# Altium PCB PCB_ESP32.PcbDoc (part 3 of 3)
Units mil, origin at the board's own origin, x right, y up, seen from the top; angles counter-clockwise.
Board outline 2700 x 1000 mil, 4 copper layers (L1, L2, L3, L4), stack 61.583 mil thick; 64 components, 73 nets, 299 pads, 161 vias.
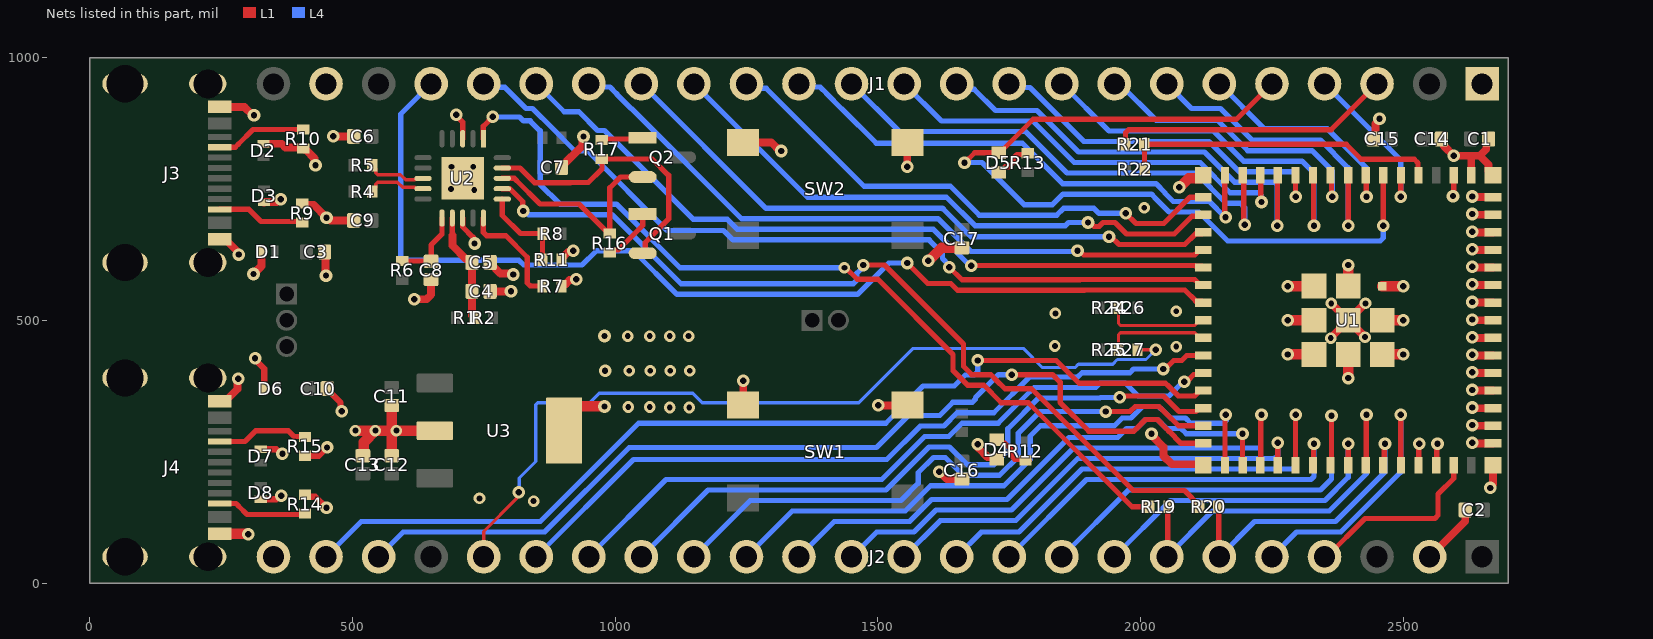
[diagram p4: the nets of this part, all layers, seen from the top]

## Via types
v1: diameter 24, hole 12, L1 to L4, tented both sides, 126 vias
v2: diameter 22, hole 11, L1 to L4, tented both sides, 35 vias

## Nets (pads, with @x,y where several pads share a name; then routed paths per layer and width w, separated by ;. In a path a pad name is that pad's centre, name@x,y a point inside that pad or via, vN(x,y) a via of type N, cw(c..) or ccw(c..) an arc to the next point about the centre after c; other vN are vias at no path point) (continued)
CON_ESP_USB_P: J2.20 R27.1 | length 1633.9
  L1 w6.03: J2.20@750,50 750,98 813.03,161.03 813.03,169.41 v1(816.47,172.85) ; R27.1@1993.91,444 v1(2029,444)
  L4 w6.03: v1(816.47,172.85) 817.75,174.13 817.75,199.89 849.14,231.28 849.14,339.47 852.67,343 951.62,343 969.64,361.01 1147.95,361.01 1165.96,343 1463.84,343 1567.41,446.57 1776.59,446.57 1812.98,410.17 1875.64,410.17 1881.71,416.25 1946.93,416.25 1955.93,425.25 2010.25,425.25 v1(2029,444)
CON_GPIO0: J1.3 R21.1 | length 539.3
  L1 w10: R21.1@1971.09,835 1971.09,856.73 1976.94,862.59 2362.59,862.59 J1.3@2450,950
DTR_FTDI: Q2.2 R16.1 U2.18 | length 406.3
  L1 w10: U2.18@785.41,770 808.39,770 812,766.39 857,721.39 931.36,721.39 987.83,664.91 R16.1@990,664.91 990,752 1010.6,772.6 Q2.2@1052.58,772.6
ESP_USB_N: R24.2 R26.2 U1.23 | length 197.8
  L1 w6.03: R26.2@1958.09,524 1958.09,493.82 1961.62,490.28 2103.18,490.28 2106.72,493.82 2106.72,495.14 2111.57,500 U1.23@2119.45,500
ESP_USB_P: R25.2 R27.2 U1.24 | length 196.3
  L1 w6.03: R27.2@1958.09,444 1958.09,472.72 1961.62,476.25 2103.18,476.25 2106.72,472.72 2106.72,471.39 2111.57,466.54 U1.24@2119.45,466.54
FTDI_RESET: C8.2 R6.2 U2.11 | length 146.1
  L1 w10: R6.2@595,612.91 595.32,612.6 649.69,612.6 C8.2@650,612.28 650,643.18 667.82,661 670.63,663.81 U2.11@670.63,694.59
FTDI_USB_N: R4.2 U2.9 | length 113.8
  L1 w6.23: R4.2@537.91,745 544.44,751.53 544.44,759.24 548.09,762.89 585.82,762.89 595.66,753.04 619.21,753.04 621.93,750.32 U2.9@634.59,750.32
FTDI_USB_P: R5.2 U2.8 | length 113.8
  L1 w6.23: R5.2@537.91,795 544.44,788.47 544.44,780.76 548.09,777.11 591.71,777.11 601.55,767.27 619.21,767.27 621.93,770 U2.8@634.59,770
GND: C1.1 C2.1 C3.1 C4.1 C5.1 C6.1 C7.1 C8.1 C9.1 C10.1 C11.1 C12.1 C13.1 C14.1 C15.1 C16.1 C17.1 D1.1 D2.1 D3.1 D4.1 D6.1 D7.1 D8.1 J1.1 J1.23 J2.2 J2.24 J3.A1B12 J3.B1A12 J3.S1 J3.S2 J3.S3 J3.S4 J4.A1B12 J4.B1A12 J4.S1 J4.S2 J4.S3 J4.S4 R7.2 R9.2 R10.2 R11.1 R14.2 R15.2 SW1.3 SW1.4 SW2.3 SW2.4 U1.1 U1.2 U1.42 U1.43 U1.46 U1.47 U1.48 U1.49 U1.50 U1.51 U1.52 U1.53 U1.54 U1.55 U1.56 U1.57 U1.58 U1.59 U1.60 U1.61 U1.62 U1.63 U1.64 U1.65 U1.66 U1.67 U1.68 U1.69 U1.70 U1.71 U1.72 U1.73 U2.3 U2.13 U2.21 U3.2 U3.4 | length 3996.4
  L1 w10: U1.42@2528.9,224.41 2529.45,224.96 2529.45,264.45 v1(2530,265) ; U1.43@2562.36,224.41 2563.68,225.73 2563.68,263.68 v1(2565,265) ; v1@2595.83,737.64 U1.2@2595.83,775.59
  L1 w10.1: v1(698,891) 698,889.09 710,877.09 U2.3@710,845.41 ; U2.13@710,694.59 710,677.87 730,657.86 730,648.83 v1(732.66,646.17)
  L1 w12: v1(315,428) 315,424.75 332.2,407.55 D6.1@332.2,370 ; D7.1@325.56,254.44 D7.1@325.56,254.44 355.37,254.38 363.75,246 v1(367,246) ; D8.1@326,159.41 355.16,159.41 361.75,166 v1(365,166) ; R14.2@410,167.91 413.65,164.27 429.73,164.27 v1(451,143) ; R15.2@410,242.09 436.09,242.09 v1(452,258) ; C10.1@452.28,370 452.28,368.43 458.88,361.83 459.06,361.83 477.7,343.19 477.7,329.3 v1(480,327)
  L1 w15: J4.A1B12@247.64,346.06 258.46,346.06 281.28,368.88 281.28,387.28 v1(283,389) ; J3.B1A12@247.64,653.94 258.46,653.94 282.28,630.12 282.28,626.72 v1(284,625) ; J3.A1B12@247.64,905.91 247.69,905.95 283,905.95 294.53,905.95 310.56,889.91 v1(313,889.91) ; v1(312,588) 327.2,603.2 D1.1@327.2,630 ; D2.1@331,835.8 365.72,835.8 372.69,828.82 405.26,828.82 R10.2@407,827.09 409.15,824.94 411.31,824.94 428.28,807.97 428.28,796.72 v1(430,795) ; D3.1@332,724.2 332.61,724.81 356.2,724.81 361.52,730.13 v1(363.95,730.13) ; R9.2@405,721.91 407.17,721.91 409.31,719.77 426.54,719.77 v1(451,695.31) 453.44,695.31 458.75,690 C9.1@502.72,690 ; C3.1@447.28,630 448.64,628.64 448.64,586.36 v1(450,585) ; v1(464,850) C6.1@502.72,850 ; v1(618,540) 641.21,540 650,548.79 C8.1@650,577.72 ; C4.1@762.28,555 v1@802.03,554.97 ; C5.1@762.28,610 762.28,608.43 781.99,588.72 804.28,588.72 v1(806,587) ; R7.2@897.91,565 897.91,567.17 900.06,569.31 906.31,569.31 913.28,576.28 924.28,576.28 v1(926,578) ; R11.1@897.91,612.83 897.91,617.17 911.03,630.28 918.54,630.28 v1(920.26,632) ; C7.1@898.28,791 898.28,792.57 938.33,832.62 938.33,847.86 v1(940.05,849.58) ; SW1.4@1243.5,338.58 1244,339.08 v1(1244,385) ; SW2.4@1243.5,838.58 1297.17,838.58 1313.66,822.09 v1(1316.09,822.09) ; v1(1501,338) 1555.91,338 SW1.3@1556.5,338.58 ; v1(1556,792) 1556,838.09 SW2.3@1556.5,838.58 ; v1(1617,212) 1631.28,197.72 C16.1@1660,197.72 ; v1(1690.22,264) 1691.94,262.28 1691.94,256.42 1708.75,239.61 1721.69,239.61 D4.1@1726,235.3 ; v1(2020.82,284) 2020.82,281.56 2043.75,258.63 2043.75,241.91 2059.64,226.03 2117.83,226.03 U1.64@2119.45,224.41 ; v2(2362,466) 2362,466.96 U1.61@2395.04,500 ; v2(2363,532) U1.61@2395.04,500 ; v2(2427,468) U1.61@2395.04,500 ; v2(2428,532) 2427.04,532 U1.61@2395.04,500 ; C15.1@2442.72,845 2447.18,849.47 2447.18,873.88 2454.53,881.22 v1(2454.53,883.66) ; J2.2@2550,50 2617.72,117.72 C2.1@2617.72,139 ; C14.1@2572.28,845 2577.38,839.9 2577.38,831.62 v1(2596,813) 2630,813 ; U1.1@2629.29,775.59 2629.29,812.29 2630,813 ; v1@2632.68,265.75 U1.46@2670.63,265.75 ; v1@2632.68,299.21 U1.47@2670.63,299.21 ; v1@2632.68,332.68 U1.48@2670.63,332.68 ; v1@2632.68,366.14 U1.49@2670.63,366.14 ; v1@2632.68,399.61 U1.50@2670.63,399.61 ; v1@2632.68,433.07 U1.51@2670.63,433.07 ; v1@2632.68,466.54 U1.52@2670.63,466.54 ; v1@2632.68,500 U1.53@2670.63,500 ; v1@2632.68,533.46 U1.54@2670.63,533.46 ; v1@2632.68,566.93 U1.55@2670.63,566.93 ; v1@2632.68,600.39 U1.56@2670.63,600.39 ; v1@2632.68,633.86 U1.57@2670.63,633.86 ; v1@2632.68,667.32 U1.58@2670.63,667.32 ; v1@2632.68,700.79 U1.59@2670.63,700.79 ; v1@2632.68,734.25 U1.60@2670.63,734.25 ; C1.1@2662.28,845 2657.82,840.53 2657.82,825.42 2645.39,813 ; v1(2665.37,180.99) 2665.37,183.42 2670.63,188.68 U1.65@2670.63,224.41 ; U1.62@2670.63,775.59 2662.38,783.84 2662.38,796.01 2645.39,813 ; 2630,813 2645.39,813
  L1 w20: J4.B1A12@247.64,94.09 248.19,93.55 301.45,93.55 v1(302,93) ; v2(506,290) v2(544,290) v2(584,290) U3.2@656.97,290 ; C13.1@520,242.28 522.23,244.52 522.23,268.23 v2@543.62,289.62 ; C12.1@575,242.28 575,280.46 ; 575,299.54 C11.1@575,337.72 ; U3.4@903.03,290 903.03,311.55 927.48,336 v1(980,336) ; v1(1596,613) 1597.08,613 1621.8,637.72 C17.1@1660,637.72 ; v1(2073.41,753) 2074.49,753 2091.33,769.84 2113.7,769.84 U1.63@2119.45,775.59 ; v1(2280,435) U1.73@2330.08,435.04 ; v1(2280,500) U1.72@2330.08,500 ; v1(2280,565) U1.71@2330.08,564.96 ; v1(2395,390) U1.70@2395.04,435.04 ; U1.69@2395.04,564.96 v1(2395,605) ; U1.68@2460,435.04 v1(2500,435) ; U1.67@2460,500 v1(2500,500) ; U1.66@2460,564.96 v1(2500,565) v1(2500,565)
  other v1: 2631.36,267.07 2631.36,300.53 2631.36,334 2631.36,367.46 2631.36,400.93 981,404 2631.36,434.39 2631.36,467.85 980,470 2631.36,501.32 2631.36,534.78 802.07,554.93 2631.36,568.25 2631.36,601.71 2631.36,635.18 2631.36,668.64 2631.36,702.11 2594.51,736.32 2631.36,735.57
  other v2: 845,156 742,161 1104,334 1141,334 1025,335 1066,335 1027,404 1067,404 1105,404 1142,404 2068,450 1837,451 1024,470 1066,470 1104,470 1140,470 1838,513 2068,517 2007,714 732,748 688,750 689,792 730,792
GPIO0: R21.2 R22.2 U1.4 | length 608.2
  L1 w10: R22.2@2007.91,787 2007.41,787.5 2007.41,834.5 R21.2@2006.91,835 2391.34,835 2420,806.34 2520.66,806.34 2528,799 2528,776.49 U1.4@2528.9,775.59
GPIO1: J1.4 U1.5 | length 315.8
  L1 w10: v1(2495,735) 2495.22,735.22 2495.22,775.37 U1.5@2495.43,775.59
  L4 w10: J1.4@2350,950 2495,805 v1(2495,735)
GPIO2: D5.1 J1.5 U1.6 | length 1643.8
  L1 w10: v1(1665,800) 1665.78,800 1684.48,818.7 D5.1@1730,818.7 1731.97,818.7 1795.86,882.59 2182.59,882.59 J1.5@2250,950 ; v1@2461.97,680.04 U1.6@2461.97,775.59
  L4 w10: v1(1665,800) 1698,800 1778,720 1832.18,720 1852.18,740 2020.55,740 2026.41,734.14 2026.41,733.53 2053.94,706 2110.82,706 2165.82,651 2456,651 2461.95,656.95 v1(2461.95,680.02)
GPIO3: J1.6 U1.7 | length 442.5
  L1 w10: U1.7@2428.5,775.59 2429.25,774.84 2429.25,735.75 v1(2430,735)
  L4 w10: J1.6@2150,950 2235,865 2355,865 2430,790 v1(2430,735)
GPIO4: J1.7 U1.8 | length 616.9
  L1 w10: v1(2395,680) U1.8@2395.04,775.59
  L4 w10: J1.7@2050,950 2097,903 2152,903 2212.24,842.76 2342.24,842.76 2395,790 v1(2395,680)
GPIO5: J1.8 U1.9 | length 574.9
  L1 w10: U1.9@2361.57,775.59 2363.29,773.88 2363.29,736.71 v1(2365,735)
  L4 w10: J1.8@1950,950 1960,950 2030,880 2146.72,880 2203.95,822.76 2326.38,822.76 2365,784.14 v1(2365,735)
GPIO6: J1.9 U1.10 | length 747.8
  L1 w10: U1.10@2327.34,776.32 2329.06,774.61 2329.06,680.94 v1(2330,680)
  L4 w10: J1.9@1850,950 1940,860 2138.43,860 2195.67,802.76 2307.24,802.76 2330,780 v1(2330,680)
GPIO7: J1.10 U1.11 | length 699.3
  L1 w10: U1.11@2294.65,775.59 2294.82,775.41 2294.82,735.18 v1(2295,735)
  L4 w10: J1.10@1750,950 1757.23,942.77 1789.23,942.77 1892,840 2130,840 2187.24,782.76 2289.14,782.76 2295,776.91 v1(2295,735)
GPIO8: J1.11 U1.12 | length 863.5
  L1 w10: v1(2260,680) 2260.59,680.59 2260.59,776.14 U1.12@2260.41,776.32
  L4 w10: J1.11@1650,950 1660.33,939.67 1683.33,939.67 1724,899 1803,899 1882,820 2121.72,820 2178.95,762.76 2254.14,762.76 2260,756.91 v1(2260,680)
GPIO9: J1.12 U1.13 | length 831.7
  L1 w10: U1.13@2227.72,775.59 2228.86,774.45 2228.86,726.14 v1(2230,725)
  L4 w10: J1.12@1550,950 1621,879 1794.72,879 1873.72,800 2113.43,800 2170.67,742.76 2224.14,742.76 2230,736.91 v1(2230,725)
GPIO10: J1.13 U1.14 | length 972
  L1 w10: U1.14@2194.63,774.43 2196.13,772.93 2196.13,683.87 v1(2198,682)
  L4 w10: J1.13@1450,950 1541,859 1781,859 1860,780 2105.15,780 2162.38,722.76 2190,722.76 2198,714.76 v1(2198,682)
GPIO11: J1.14 U1.15 | length 998.3
  L1 w10: U1.15@2160.79,775.59 2160.39,775.2 2160.39,697.11 v1(2161.73,695.77)
  L4 w10: J1.14@1350,950 1356.23,943.77 1390.23,943.77 1403,931 1403,930.53 1430.53,903 1431,903 1497,837 1774.72,837 1851.72,760 2029,760 2046.41,742.59 2046.41,741.82 2062.22,726 2130.86,726 2161.09,695.77 v1(2161.73,695.77)
GPIO12: J1.15 U1.16 | length 1011.2
  L1 w10: v1(1971.86,703.51) 1991.37,684 2044,684 2094.25,734.25 U1.16@2119.45,734.25
  L4 w10: J1.15@1250,950 1258.73,941.27 1287.73,941.27 1474,755 1638,755 1693,700 1798.72,700 1840.47,700 1853.47,713 1911.18,713 1920.68,703.51 v1(1971.86,703.51)
GPIO13: J1.16 U1.17 | length 1114.5
  L1 w10: v1(1900,686) 1903.79,686 1911.46,678.33 1921.14,678.33 1928.82,686 1951.18,686 1973.18,664 2064,664 2097.91,697.91 2116.57,697.91 U1.17@2119.45,700.79
  L4 w10: J1.16@1150,950 1366,734 1630.72,734 1684.72,680 1856.82,680 1862.82,686 v1(1900,686)
GPIO14: J1.17 U1.18 | length 1205.9
  L1 w10: v1(1940,659) 1943.79,659 1958.79,644 2084,644 2104.45,664.45 2116.57,664.45 U1.18@2119.45,667.32
  L4 w10: J1.17@1050,950 1287,713 1622.57,713 1623.57,712 1624.43,712 1677.43,659 v1(1940,659)
GPIO15: J1.18 U1.19 | length 1310.3
  L1 w10: v1(1880,632) 1883.79,632 1891.79,624 2102.84,624 2108.7,629.86 2108.7,630.98 2111.57,633.86 U1.19@2119.45,633.86
  L4 w10: J1.18@950,950 956.23,943.77 990.23,943.77 1003,931 1003,930.53 1030.53,903 1031,903 1241,693 1614.28,693 1615.28,692 1616.15,692 1677.15,631 1879,631 v1(1880,632)
GPIO16: J1.19 U1.20 | length 1414.3
  L1 w10: v1(1677.63,604) 2102.84,604 2103.58,603.27 2116.57,603.27 U1.20@2119.45,600.39
  L4 w10: J1.19@850,950 903.32,896.68 931.14,896.68 966.82,861 980,861 1149,692 1213.72,692 1232.72,673 1606,673 1675,604 v1(1677.63,604)
GPIO17: J1.20 U1.21 | length 1537.8
  L1 w10: v1(1636,601) 1660,577 1884.38,577 1884.9,577.52 2102.84,577.52 2108.7,571.66 2108.7,569.8 2111.57,566.93 U1.21@2119.45,566.93
  L4 w10: J1.20@750,950 756.73,943.27 790.27,943.27 830.53,903 843,903 846.5,899.5 846.75,899.5 877.5,868.75 877.5,868.5 923.42,822.58 947.42,822.58 1099,671 1206.43,671 1224.43,653 1597.72,653 1623,627.72 1623,617.79 1636,604.79 v1(1636,601)
GPIO18: J1.21 U1.22 | length 1989.9
  L1 w10: v1(1556,609) 1595,570 1638.72,570 1651.72,557 1892.67,557 1893.19,557.52 2084.02,557.52 2105.2,536.34 2116.57,536.34 U1.22@2119.45,533.46
  L4 w10: J1.21@650,950 592,892 592,619.86 597.86,614 817.18,614 826.18,605 937.18,605 964.55,632.37 1034.63,632.37 1117.66,549.34 1461.34,549.34 1521,609 v1(1556,609)
GPIO21: J2.19 U1.25 | length 1428.1
  L1 w10: v1(2043,407.23) 2046.79,407.23 2063.22,423.67 2078.44,423.67 2087.84,433.07 U1.25@2119.45,433.07
  L4 w10: J2.19@850,50 1034.97,234.97 1516.93,234.97 1580.96,299 1626,299 1651,324 1720.72,324 1788.88,392.16 1880.27,392.16 1888.35,400.23 1979.75,400.23 1986.75,407.23 v1(2043,407.23)
GPIO26: J2.18 U1.26 | length 1334.3
  L1 w10: v1(2083.04,383) 2085.72,385.68 2090.09,385.68 2101.14,396.73 2116.57,396.73 U1.26@2119.45,399.61
  L4 w10: J2.18@950,50 1097.13,197.13 1507.37,197.13 1589.25,279 1635,279 1660,304 1729,304 1790,365 1790.64,365 1797.8,372.16 1914.69,372.16 1922.77,380.23 1971.46,380.23 1995.69,356 2053.86,356 2080.86,383 v1(2083.04,383)
GPIO33: J2.17 U1.28 | length 1263.9
  L1 w10: v1(1960.28,353.23) 1962.96,355.91 1981.55,355.91 1981.64,356 2043.57,356 2073.34,326.23 2105.13,326.23 2111.57,332.68 U1.28@2119.45,332.68
  L4 w10: J2.17@1050,50 1177.13,177.13 1515.66,177.13 1597.53,259 1636.47,259 1670.47,225 1720.86,225 1747.36,251.5 1747.36,293.43 1806.09,352.16 1922.98,352.16 1924.05,353.23 v1(1960.28,353.23)
GPIO34: J2.16 U1.29 | length 1169.1
  L1 w10: v1(1934,326.23) 1980.16,326.23 1989.92,336 2035.29,336 2072.08,299.21 U1.29@2119.45,299.21
  L4 w10: J2.16@1150,50 1257.13,157.13 1543.99,157.13 1576.93,190.07 1576.93,210.12 1605.82,239 1628.18,239 1646.05,221.14 1662.18,205 1731.72,205 1767.36,240.64 1767.36,285.15 1808.45,326.23 v1(1934,326.23)
GPIO35: J2.15 U1.31 | length 1179
  L1 w10: U1.31@2160.79,224.41 v1@2160.79,319.21
  L4 w10: J2.15@1250,50 1337.13,137.13 1552.27,137.13 1600.15,185 1740,185 1790,235 1790,279.5 1809.73,299.23 1950.43,299.23 1965.2,314 1982,314 2004,336 2034,336 2039,331 2040.28,331 2057.28,314 2085.37,314 2095.37,304 2157.14,304 2163,309.86 2163,319.28 v1(2161.93,320.35)
GPIO36: J2.14 U1.32 | length 1023
  L1 w10: v1(2194,284) 2194,224.66 U1.32@2194.25,224.41
  L4 w10: J2.14@1350,50 1417,117 1489.59,117 1489.72,117.13 1560.56,117.13 1602.43,159 1745.86,159 1863.86,277 1956.48,277 1973.48,294 1992.63,294 2009.63,311 2032,311 2049,294 2077.09,294 2087.09,284 v1(2194,284)
GPIO37: J2.13 U1.33 | length 1024.5
  L1 w10: U1.33@2228.48,223.68 2228.86,224.06 2228.86,318.86 v1(2230,320)
  L4 w10: J2.13@1450,50 1450.87,50 1498,97.13 1568.84,97.13 1610.72,139 1754.15,139 1872.15,257 2228,257 2228,318 v1(2230,320)
GPIO38: J2.12 U1.34 | length 857.7
  L1 w10: v1(2261,267) 2261.18,266.82 U1.34@2261.18,224.41
  L4 w10: J2.12@1550,50 1619,119 1762.43,119 1880.43,237 2255.14,237 2261,242.86 v1(2261,267)
GPIO39: J2.11 U1.35 | length 909.5
  L1 w10: U1.35@2294.82,224.27 2294.82,319.82 v1(2295,320)
  L4 w10: J2.11@1650,50 1697,97 1768.72,97 1888.72,217 2289.14,217 2295,222.86 v1(2295,320)
GPIO40: J2.10 U1.36 | length 746.8
  L1 w10: U1.36@2328.11,224.41 2329.06,225.35 2329.06,264.06 v1(2330,265)
  L4 w10: J2.10@1750,50 1897,197 2324.14,197 2330,202.86 v1(2330,265)
GPIO41: J2.9 U1.37 | length 790
  L1 w10: U1.37@2362.34,223.68 2363.29,224.63 v1(2363.29,318.29)
  L4 w10: J2.9@1850,50 1977,177 2342.43,177 2363.29,197.86 v1(2363.29,318.29)
GPIO42: J2.8 U1.38 | length 612
  L1 w10: U1.38@2395.04,224.41 v1(2395,265)
  L4 w10: J2.8@1950,50 2057,157 2350.72,157 2395,201.28 v1(2395,265)
GPIO45: J2.5 U1.41 | length 516
  L1 w10: U1.41@2495,224.88 2495.22,225.1 2495.22,319.78 v1(2495,320)
  L4 w10: J2.5@2250,50 2297,97 2381,97 2495,211 v1(2495,320)
GPIO46: J2.4 U1.44 | length 356.6
  L1 w10: J2.4@2350,50 2354.18,50 2427.18,123 2560.26,123 2566.12,128.86 2566.12,169.42 2595.83,199.13 U1.44@2595.83,224.41
GPIO47: J2.23 U1.27 | length 1869.9
  L1 w10: v1(1690,423.56) 1839.44,423.56 1882.77,380.23 2047.62,380.23 2051.86,376 2071.86,356 2102.84,356 2108.7,361.86 2108.7,363.27 2111.57,366.14 U1.27@2119.45,366.14
  L4 w10: J2.23@450,50 517,117 857.72,117 1044.72,304 1515,304 1586,375 1645.43,375 1666.43,396 1684.14,396 1690,401.86 v1(1690,423.56)
GPIO48: J2.22 U1.30 | length 1810.1
  L1 w10: v1(1755.09,396.56) 1832.59,396.56 1847,382.14 1847,343.37 1901.33,289.04 1987.67,289.04 2009.63,311 2032,311 2047.82,295.18 2047.82,294.9 2053.67,289.04 2053.96,289.04 2077.25,265.75 U1.30@2119.45,265.75
  L4 w10: J2.22@550,50 597,97 866,97 1027,258 1497.28,258 1558.28,319 1617.72,319 1642.72,344 1680.14,344 1686,349.86 1686,353 1729.56,396.56 v1(1755.09,396.56)
NetC4_2: C4.2 C5.2 R1.2 R2.2 U2.12 | length 209.8
  L1 w10: 690.32,661 U2.12@690.32,694.59
  L1 w15: 690.32,661 690.32,642.5 716.14,616.67 721.04,616.67 C5.2@727.72,610 C4.2@727.72,555 727.72,509.37 R2.2@732.09,505
NetD4_2: D4.2 R12.1 | length 90.1
  L1 w10: D4.2@1726,272.7 1732.81,265.89 1742.21,265.89 1754.19,253.91 1754.19,253.05 1754.78,252.46 1754.78,241.25 1760.64,235.39 1778.69,235.39 R12.1@1781,233.09 ; R12.1@1776.93,233.09 R12.1@1788.55,233.09
NetD5_2: D5.2 R13.1 | length 75.5
  L1 w10: D5.2@1730,781.3 1731.97,781.3 1742.56,791.89 1749.99,791.89 1758.78,800.68 1758.78,809.75 1764.64,815.61 1782.69,815.61 R13.1@1785,817.91
NetJ3_A5: J3.A5 R10.1 | length 173.4
  L1 w10: J3.A5@247.64,829.13 247.77,829.26 277.26,829.26 283,835 310.91,862.91 R10.1@407,862.91
NetJ3_B5: J3.B5 R9.1 | length 166.6
  L1 w10: J3.B5@247.64,711.02 303.3,711.02 326.32,688 R9.1@404.72,688
NetJ4_A5: J4.A5 R15.1 | length 175.6
  L1 w10: J4.A5@247.64,269.29 295.72,269.29 316,289.57 378.43,289.57 389.05,278.95 408.96,278.95 R15.1@410,277.91
NetJ4_B5: J4.B5 R14.1 | length 171.8
  L1 w10: J4.B5@247.64,151.18 278.82,151.18 283,147 299.81,130.19 408.1,130.19 R14.1@410,132.09
NetQ1_1: Q1.1 R16.2 | length 106
  L1 w10: R16.2@990,629.09 994.65,633.73 1006.12,633.73 1052.58,680.19 Q1.1@1052.58,702.4
NetQ2_1: Q2.1 R17.2 | length 79.4
  L1 w10: R17.2@975,842.91 977.24,845.16 1050.33,845.16 Q2.1@1052.58,847.4
NetR7_1: R7.1 U2.15 | length 211.4
  L1 w10: U2.15@749.37,694.59 749.37,666.86 755.23,661 792,661 833,620 833,570.86 838.86,565 R7.1@862.09,565
RTS_FTDI: Q1.2 R17.1 U2.19 | length 539.7
  L1 w10: U2.19@785.41,789.68 808.91,789.68 809,789.77 818.8,789.77 846.75,761.83 915.25,761.83 915.42,762 949,762 975,788 R17.1@975,807.09 1070.68,807.09 1102,775.77 1102,693 1094.29,685.29 1094.29,684.93 1057.37,648 1057.37,632.39 Q1.2@1052.58,627.6
RXD_FTDI: R19.2 U2.1 | length 1684.2
  L1 w10: U2.1@749.37,845.41 749.37,869.13 767,886.76 v1(767,887) ; v2(1436.41,600) 1438.82,600 1460.82,578 1500,578 1643,435 1643,404.09 1670.53,376.56 1701.44,376.56 1735,343 1786.18,343 1984.18,145 R19.2@2017.09,145
  L4 w10: v1(767,887) 818.25,887 825.75,879.5 838.46,879.5 857.5,860.46 857.5,758.5 895,721 1002.57,721 1123.57,600 v2(1436.41,600)
TXD_FTDI: R20.2 U2.17 | length 1652.9
  L1 w10: U2.17@785.41,750.32 799.79,750.32 809,741.11 824.45,725.65 824.45,708.64 v1(825.09,708) ; v1(1472,605) 1513,605 1663,455 1663,412.37 1678.82,396.56 1714.82,396.56 1726,385.37 1741.82,369.56 1792.53,369.56 1986.09,176 2083.25,176 2112.09,147.17 R20.2@2112.09,145
  L4 w10: v1(825.09,708) 828.88,708 835.88,701 994.28,701 1125.95,569.34 1453.05,569.34 1460.12,576.41 1460.12,589.33 1472,601.21 v1(1472,605)
U0RXD: J2.6 R20.1 U1.40 | length 573.4
  L1 w10: R20.1@2147.91,145 2148.96,143.96 2148.96,51.04 J2.6@2150,50 ; U1.40@2461.97,224.41 2463.48,225.93 2463.48,263.48 v1(2465,265)
  L4 w10: J2.6@2150,50 2217,117 2371,117 2465,211 v1(2465,265)
U0TXD: J2.7 R19.1 U1.39 | length 750.3
  L1 w10: J2.7@2050,50 2051.46,51.46 2051.46,143.54 R19.1@2052.91,145 ; U1.39@2429.25,223.7 2429.25,319.25 v1(2430,320)
  L4 w10: J2.7@2050,50 2137,137 2359,137 2430,208 v1(2430,320)
VBUS_SENSE: R8.1 R11.2 U2.16 | length 172
  L1 w10: U2.16@785.41,730.63 785.41,699.59 820,665 R8.1@862.09,665 R11.2@862.09,615
pads on no net: J1.24 J3.A8 J3.B8 J4.A8 J4.B8 U2.2 U2.4 U2.5 U2.6 U2.7 U2.14

## Polygon pours and split planes (outlines as drawn)
GND on L1 "GND_L01_P008" (solid, remove dead copper, pour order 8): 1169,509 1169,158 894,158 822,230 494,230 494,342 501,349 822,349 822,350 977.81,505.81
GND on L1 "GND_L01_P007" (solid, remove dead copper, pour order 7): 2262,618 2522,618 2521,364 2521,362 2520,363 2261,363
+5V_VBUS2 on L1 "+5V_VBUS2_L01_P006" (solid, remove dead copper, pour order 6): 345,471 387,471 434,424 434,332 347,332
+5V_VBUS1 on L1 "+5V_VBUS1_L01_P005" (solid, remove dead copper, pour order 5): 342,673.04 342,528 429,528 429,673.96
+5 on L1 "+5_L01_P004" (solid, remove dead copper, pour order 4): 700,357.86 700,402 517,402 396,523 351,523 351,478 352,477 391,477 511.16,356.84
+3V3_REG on L1 "+3V3_REG_L01_P003" (solid, remove dead copper, pour order 3): 694.5,222.49 694.5,174.5 610.5,174.5 566.78,130.78 481.71,139.58 500.5,209.38 500.5,221.49
+3V3_FTDI on L1 "+3V3_FTDI_L01_P002" (solid, remove dead copper, pour order 2): 607,565 556,568 549,578 538,589 538,627 525.5,646.5 523,708 540,710 571,740 574,740 599,740 599,720 609,710 647,710 647,688 592,633 565,633 565,599 575,589 607,589
+3V3_FTDI on L1 "+3V3_FTDI_L01_P001" (solid, remove dead copper, pour order 1): 812,853 822,864 875,864 878,861 878,776 852,776 847,781 847,793 828,812 812,812 812,844
+3V3 on L1 "+3V3_L01_P000" (solid, remove dead copper, pour order 0): 2465,871 2465,826 2551,826 2552,827 2552,899 2486.3,899 2486.19,899.11
GND on L2 "GND_L02_P012" (solid, remove dead copper, pour order 12): 20,980 2680,980 2680,20 20,20
+3V3_REG on L2 "+3V3_REG_L02_P011" (solid, remove dead copper, pour order 11): 485,185 485,125 645,125 645,185
+3V3 on L2 "+3V3_L02_P009" (solid, remove dead copper, pour order 9): 2680,20 2680,980 1000,980 940,920 960,900 960,860 1020,860 1160,720 1320,720 1320,600 1400,520 1400,480 1437.26,480 1457.26,500 1460,500 1460,540 1380,620 1380,720 1960,720 2020,780 2480,780 2580,680 2580,240 2420,240 2300,120 2300,20
GND on L3 (split plane): 2699.95,0.05 0.05,0.05 0.05,999.95 2699.95,999.95

## Silkscreen, mask and mechanical layers (free items; w line width, h text height)
Top Overlay:
  lines w6: 725,880 725,912 ; 726,100 726,135 ; 1225,95 1225,127 ; 1225,879 1225,911 ; 1727,95 1727,129 ; 1729,876 1729,908 ; 2249,100 2249,130 ; 2255,873 2255,905
  text "J1" at 2286,866 h40
  text "USER" at 1636,711 h30
  text "BOOT/USR" at 1236,576 h40
  text "USB1" at 431,536 h40
  text "UART" at 26,526 h40
  text "3V3" at 1486,491 h40
  text "REG" at 1211,486 h40
  text "+5V" at 431,476 h40
  text "ESP" at 26,426 h40
  text "USB2" at 431,416 h40
  text "RESET" at 1301,386 h40
  text "POWER" at 1703,141 h40
  text "J2" at 2306,106 h40
Bottom Overlay:
  lines w6: 2665,450 2665,295 ; 2665,725 2665,615 2665,740 ; 2675,305 2665,295 ; 2675,730 2665,740 ; 2665,295 2655,305 2665,295 ; 2665,740 2655,730 2665,740
  text "IO15" at 975,876 h40 r90
  text "IO14" at 1071,876 h40 r90
  text "IO12" at 1275,875 h40 r90
  text "IO11" at 1377,875 h40 r90
  text "NC" at 374,874 h40 r90
  text "GND" at 474,874 h40 r90
  text "+5V" at 564,874 h40 r90
  text "IO18" at 664,874 h40 r90
  text "IO17" at 774,874 h40 r90
  text "IO16" at 874,874 h40 r90
  text "IO13" at 1176,874 h40 r90
  text "+3V3" at 2574,874 h40 r90
  text "IO10" at 1476,873 h40 r90
  text "IO8" at 1686,870 h40 r90
  text "IO7" at 1783,869 h40 r90
  text "IO6" at 1880,868 h40 r90
  text "IO2" at 2282,868 h40 r90
  text "IO5" at 1977,867 h40 r90
  text "IO9" at 1585,866 h40 r90
  text "IO4" at 2085,866 h40 r90
  text "IO1" at 2382,866 h40 r90
  text "IO0" at 2484,865 h40 r90
  text "IO3" at 2179,864 h40 r90
  text "PIN1" at 2684,594 h40 r90
  text "DESIGNED BY TRUONG" at 2238,542 h40
  text "10/12/2025" at 1328,532 h40
  text "USB+" at 789,282 h40 r90
  text "USB-" at 692,281 h40 r90
  text "IO45" at 2282,277 h40 r90
  text "IO26" at 978,275 h40 r90
  text "IO33" at 1084,274 h40 r90
  text "IO34" at 1184,274 h40 r90
  text "IO35" at 1284,274 h40 r90
  text "IO36" at 1384,274 h40 r90
  text "IO37" at 1484,274 h40 r90
  text "IO38" at 1584,274 h40 r90
  text "IO42" at 1984,274 h40 r90
  text "+3V3" at 2664,274 h40 r90
  text "IO40" at 1781,273 h40 r90
  text "IO41" at 1884,273 h40 r90
  text "IO39" at 1686,272 h40 r90
  text "IO46" at 2377,272 h40 r90
  text "IO47" at 484,264 h40 r90
  text "IO48" at 584,264 h40 r90
  text "IO21" at 884,264 h40 r90
  text "GND" at 2574,244 h40 r90
  text "GND" at 374,239 h40 r90
  text "EN" at 2484,204 h40 r90
  text "TX" at 2074,194 h40 r90
  text "RX" at 2164,194 h40 r90
Top Solder:
  drawing of 6 lines, arcs and shapes, not listed
Board Shape:
  the board outline again, w20

## Text inside footprints (layer, text, board x,y; h text height)
J1: Bottom Overlay "GND" at 2636,766 h40 r270
J2: Bottom Overlay "1" at 2636,-34 h40 r270